# Altium PCB Receive config.PcbDoc
Units mm, origin at the board's own origin, x right, y up, seen from the top; angles counter-clockwise.
Board outline 22 x 18.5 mm, 2 copper layers (Top Layer, Bottom Layer); 6 components, 8 nets, 19 pads, 0 vias.
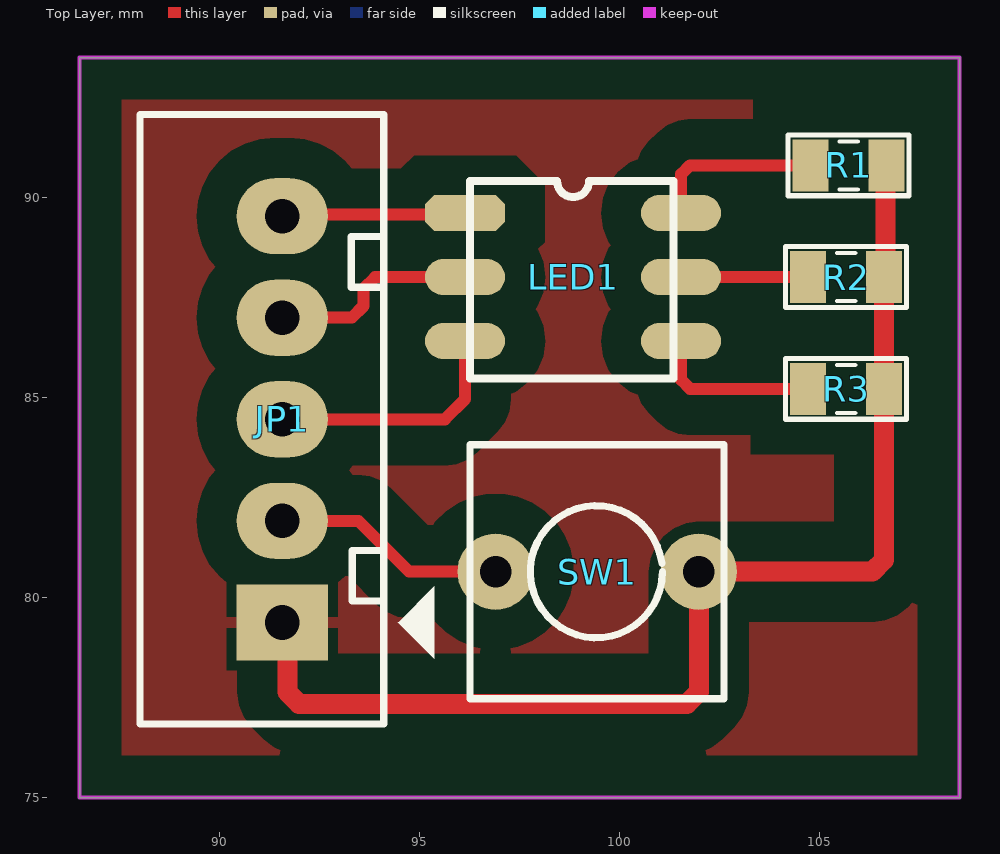
[diagram p0: Top Layer view]
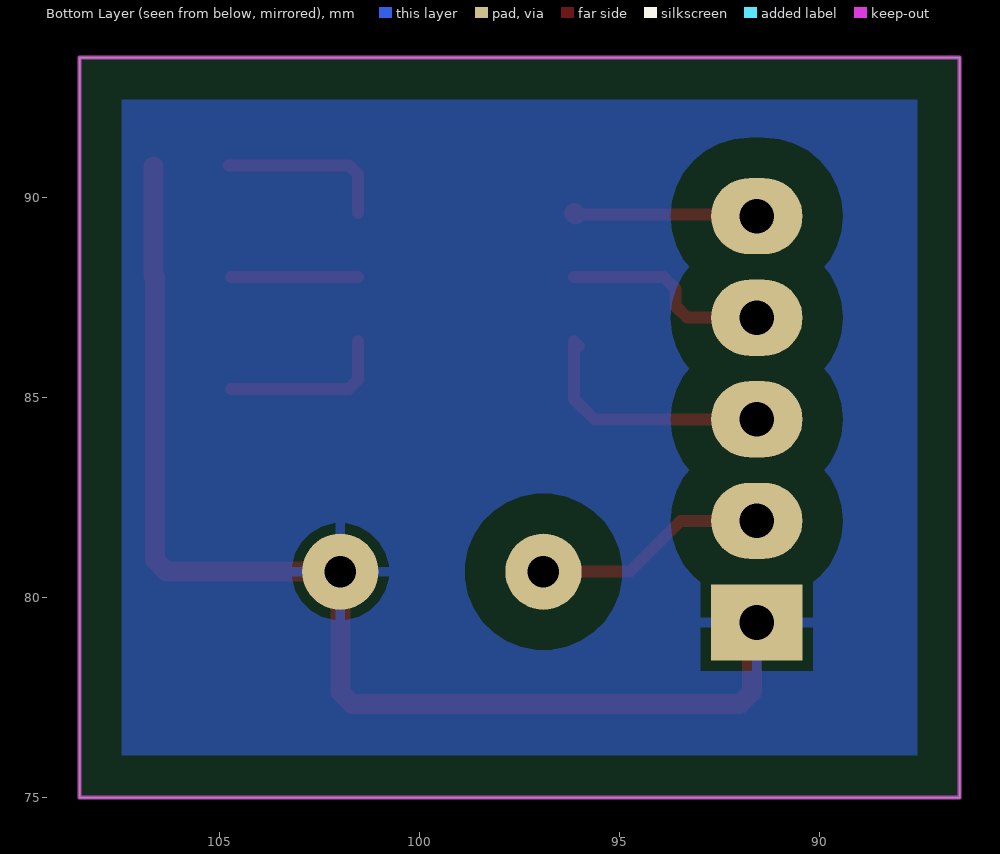
[diagram p1: Bottom Layer view, seen from below]
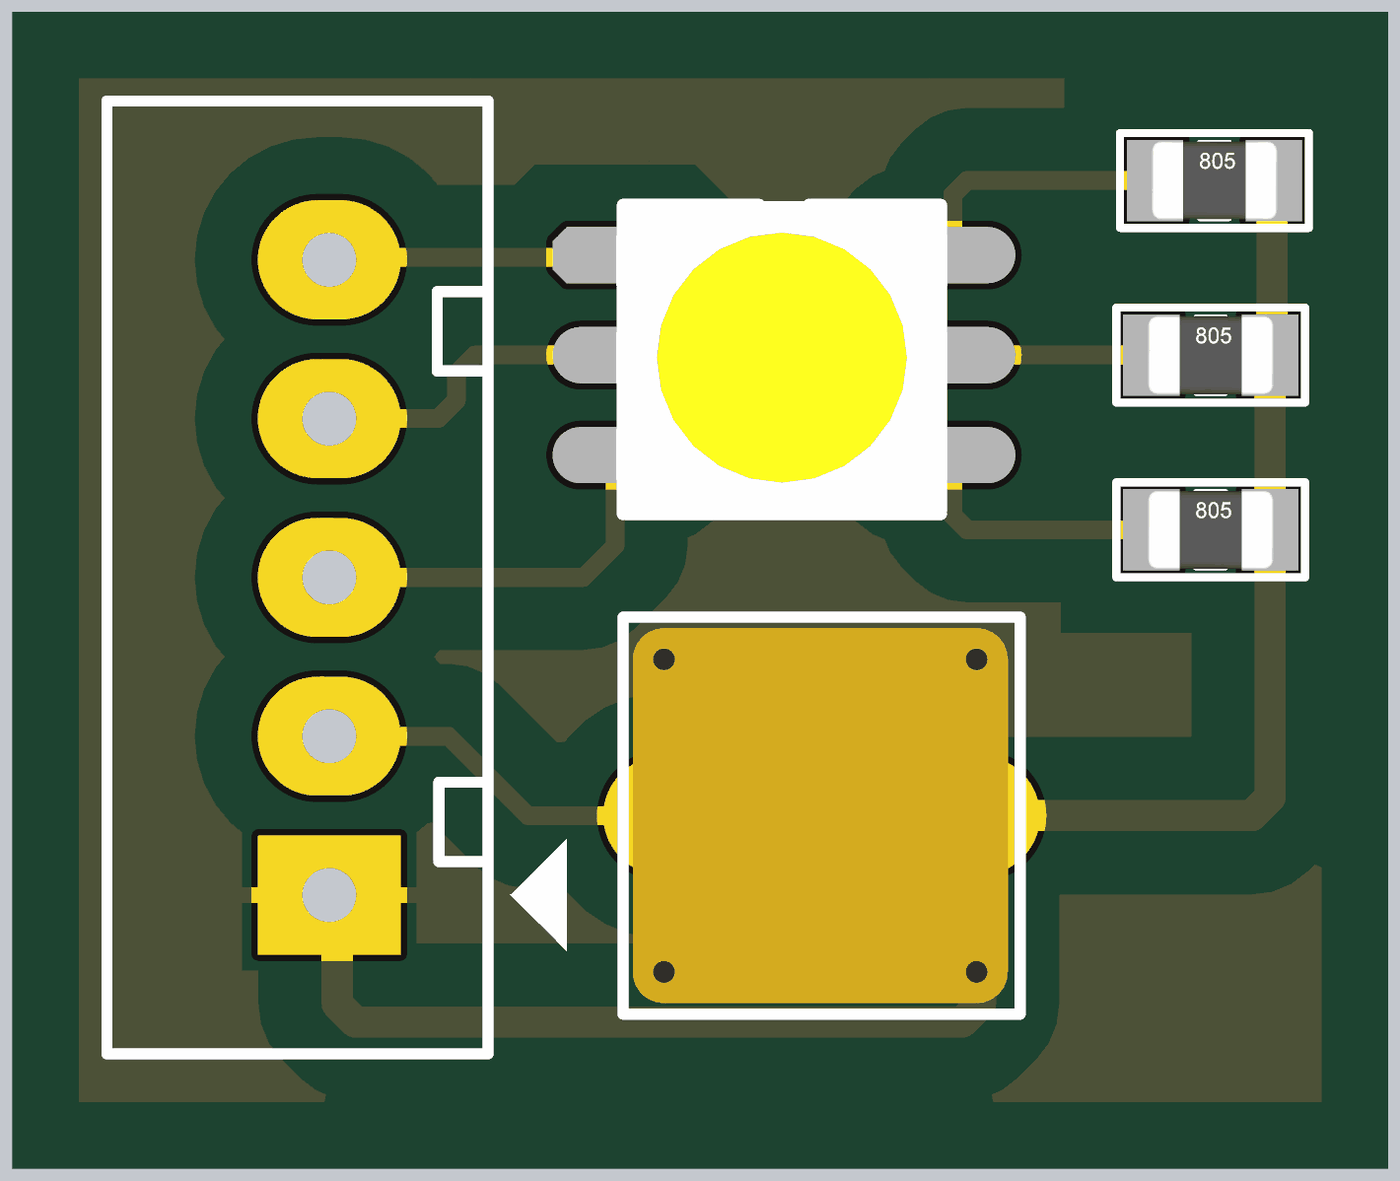
[diagram p2: 3D render of the assembled board from above, using the file's embedded part models]

## Layer stack, top to bottom
Top Solder: solder mask 0.0102, Solder Resist, Dk 3.5
Top Layer: signal copper 0.0356
Dielectric 1: dielectric 0.32, FR-4, Dk 4.8
Bottom Layer: signal copper 0.0356
Bottom Solder: solder mask 0.0102, Solder Resist, Dk 3.5

## Board outline
86.5,75 108.5,75 108.5,93.5 86.5,93.5

## Design rules (kind name [scope] priority, off if disabled: settings)
Clearance [All] p1: gap=1 ignorepadtopadclearanceinfootprint=FALSE
PolygonConnect [All] p1: connectstyle=Relief reliefconductorwidth=0.254 reliefentries=4 polygonreliefangle="90 Angle" airgapwidth=0.254
RoutingVias [All] p1: holewidth=0.711 width=1.27 viastyle="Through Hole" minholewidth=0.711 minwidth=1.27 maxholewidth=0.711 maxwidth=1.27
SolderMaskExpansion [All] p1: expansion=0.102 istentingtop=FALSE
Width [All] p1: maxlimit=0.5 minlimit=0.3 preferedwidth=0.5
30 further rules are at their usual default settings.

## Components (designator, comment, footprint, x,y, rotation, side; value= is the part's Value field where it differs from the comment)
JP1 "JP5" XH2.54-5P 91.567,79.375 r90 top value="Connector 5"
LED1 "LED RGB 5050" "LED RGB 5050" 98.933,88.011 r0 top
R1 "75R" RES-SMD-0805 105.725,90.805 r0 top value="R1/4W - 1K"
R2 "130R" RES-SMD-0805 105.664,88.011 r0 top value="R1/4W - 1K"
R3 "75R" RES-SMD-0805 105.664,85.217 r0 top value="R1/4W - 1K"
SW1 "SW" SW2 96.901,80.645 r0 top value="SW chip 2 pin"

## Footprints (in the part's own frame and the unit in brackets; to place one, negate y for a bottom-side part, rotate by r counter-clockwise, add the part's x,y. Pads: shape width x height; smd on the part's side, far side on the other; paste and mask are expansions set on the pad)
"LED RGB 5050" [mm]
  oct 2x0.9 smd: 1(-2.794,1.6)
  oval 2x0.9 smd: 2(-2.794,0) 3(-2.794,-1.6) 4(2.606,-1.6) 5(2.606,0) 6(2.606,1.6)
  silkscreen extent -2.67,-2.54 2.41,2.4, body extent -2.78,-2.54 2.52,2.46, height 1.6
RES-SMD-0805 [mm]
  rect 0.9x1.3 smd: 1(-0.95,0) 2(0.95,0)
  silkscreen extent -1.51,-0.76 1.51,0.76, body extent -1,-0.62 1,0.63, height 0.8
SW2 [mil] "SW button 2pin, 250x 250 mil"
  round 75 hole 31: 1(0,0) 2(200,0)
  silkscreen extent -25,-125 225,125, body extent -19,-118 217,118, height 177
XH2.54-5P [mil] "CON5"
  rect 75x90 hole 34: 1(0,0)
  oval 75x90 hole 34: 2(100,0) 3(200,0) 4(300,0) 5(400,0)
  silkscreen extent -100,-150 500,140

## Part data
JP1: library part "Header 5P", "Connector 5"
LED1: Color="Red & Green & Blue", Manufacturer="Würth Elektronik eiSos GmbH", PartNo=150141M173100, ComponentLink1Description=Manufacturer, ComponentLink1URL=http://www.we-online.de, ComponentLink2Description=Datasheet, ComponentLink2URL=http://katalog.we-online.com/led/datasheet/150141M173100.pdf, Created by="Christin Otto", Created Date="June 2013"
R1 R2 R3: library part "RES 1/4W", "Tro 1/4W"
SW1: library part SW2, "Switch button 2 pin"

## Nets (pads, with @x,y where several pads share a name; then routed paths per layer and width w, separated by ;. In a path a pad name is that pad's centre, name@x,y a point inside that pad or via, vN(x,y) a via of type N, cw(c..) or ccw(c..) an arc to the next point about the centre after c; other vN are vias at no path point)
BUTTON: JP1.2 SW1.1 | length 5.9
  Top Layer w0.3: JP1.2 93.472,81.915 94.742,80.645 SW1.1
CN_B: JP1.3 LED1.3 | length 6.4
  Top Layer w0.3: JP1.3 95.631,84.455 96.139,84.963 LED1.3 LED1.3@96.012,86.284
CN_G: JP1.5 LED1.1 | length 4.6
  Top Layer w0.3: JP1.5@91.605,89.573 LED1.1@96.101,89.573
  Top Layer w0.5: JP1.5 JP1.5@91.605,89.573 ; LED1.1@96.101,89.573 LED1.1
CN_R: JP1.4 LED1.2 | length 5.6
  Top Layer w0.3: JP1.4 93.306,86.995 93.599,87.288 93.599,87.718 93.892,88.011 LED1.2
  Top Layer w0.5: JP1.4 JP1.4@91.821,86.741
GND: JP1.1 R1.2 R2.2 R3.2 SW1.2 | length 30
  Top Layer w0.381: R2.2 R2.2@106.645,88.042 ; R1.2@106.645,90.775 R1.2
  Top Layer w0.5: JP1.1 91.694,79.248 91.694,77.636 91.987,77.343 101.688,77.343 101.981,77.636 SW1.2 106.321,80.645 106.614,80.938 R2.2 ; R2.2@106.645,88.042 R1.2@106.645,90.775
NetLED1_4: LED1.4 R3.1 | length 4.2
  Top Layer w0.3: LED1.4 101.539,85.44 101.762,85.217 R3.1
NetLED1_5: LED1.5 R2.1 | length 3.2
  Top Layer w0.3: LED1.5 R2.1
NetLED1_6: LED1.6 R1.1 | length 4.3
  Top Layer w0.3: LED1.6 101.539,90.582 101.762,90.805 R1.1

## Polygon pours and split planes (outlines as drawn)
GND on Top Layer "GND_L01_P000" (solid, pour order 0): 86.5,93.5 86.5,75 108.5,75 108.5,93.5
GND on Bottom Layer "GND_L02_P001" (solid, pour order 1): 86.5,93.5 86.5,75 108.5,75 108.5,93.5

## Keep-outs
Keep-Out Layer:
  lines w0.1: 86.5,75 86.5,93.5 87.5,93.5 107.5,93.5 108.5,93.5 108.5,75 86.5,75